# Altium PCB PCB1.PcbDoc
Units mil, origin at the board's own origin, x right, y up, seen from the top; angles counter-clockwise.
Board outline 2040 x 4130 mil, 2 copper layers (Top Layer, Bottom Layer); 17 components, 16 nets, 106 pads, 0 vias.
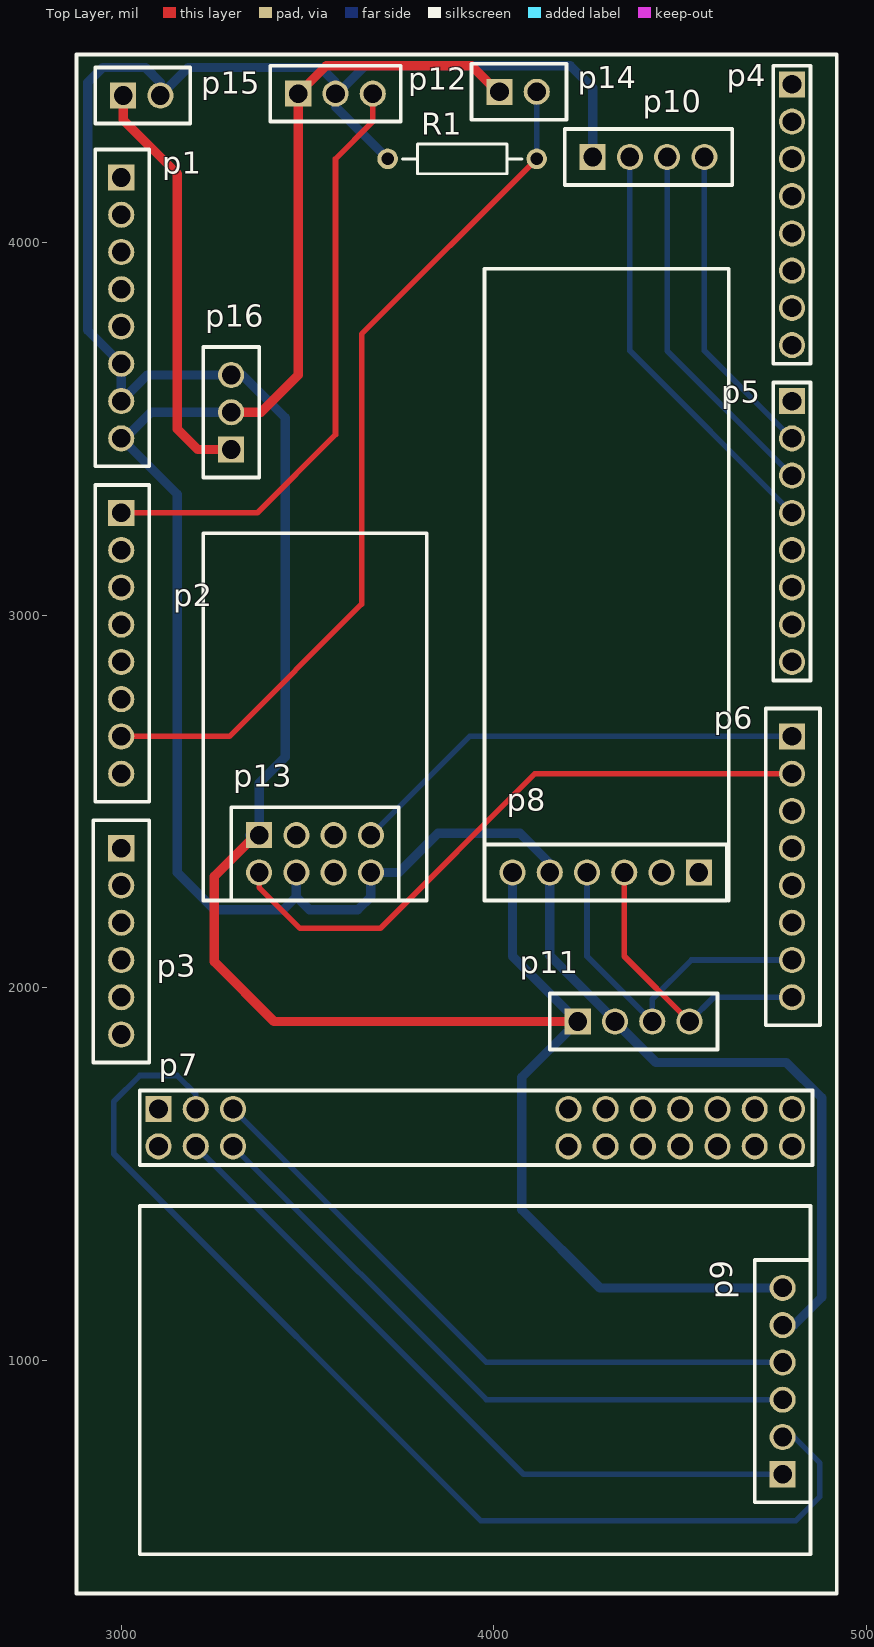
[diagram p0: Top Layer view]
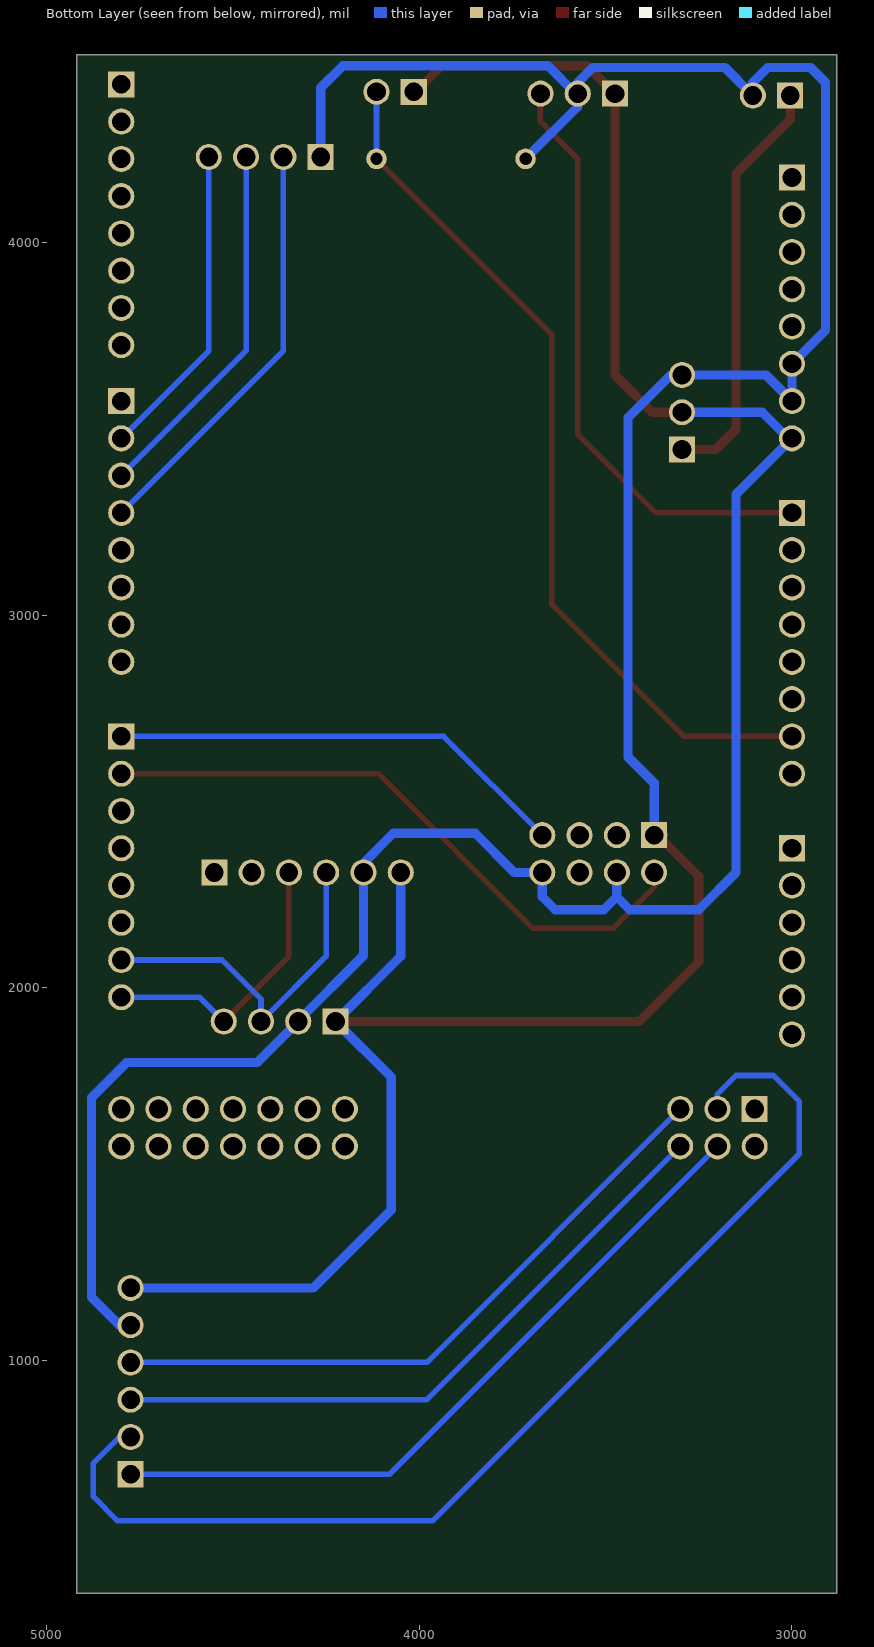
[diagram p1: Bottom Layer view, seen from below]

## Layer stack, top to bottom
Top Solder: solder mask 0.4, Solder Resist, Dk 3.5
Top Layer: signal copper 1.4
Dielectric 1: dielectric 12.6, FR-4, Dk 4.8
Bottom Layer: signal copper 1.4
Bottom Solder: solder mask 0.4, Solder Resist, Dk 3.5

## Board outline
2880,375 4920,375 4920,4505 2880,4505

## Design rules (kind name [scope] priority, off if disabled: settings)
Clearance [All] p1: gap=10 ignorepadtopadclearanceinfootprint=FALSE except(0: Arc-Hole Track-Hole SMDPad-Hole THPad-Hole Via-Hole Fill-Hole Poly-Hole Region-Hole Text-Hole)
PolygonConnect [All] p1: connectstyle=Relief reliefconductorwidth=10 reliefentries=4 polygonreliefangle="90 Angle" airgapwidth=10
RoutingVias [All] p1: holewidth=28 width=50 viastyle="Through Hole" minholewidth=28 minwidth=50 maxholewidth=28 maxwidth=50
SolderMaskExpansion [All] p1: expansion=4
Width Width_3 [InNet('V6V')] p1: maxlimit=30 minlimit=20 preferedwidth=25
Width Width_2 [InNet('VCC')] p2: maxlimit=30 minlimit=20 preferedwidth=25
Width Width_1 [InNet('GND')] p3: maxlimit=30 minlimit=20 preferedwidth=25
Width [All] p4: maxlimit=20 minlimit=10 preferedwidth=15
30 further rules are at their usual default settings.

## Components (designator, comment, footprint, x,y, rotation, side; value= is the part's Value field where it differs from the comment)
p1 "pin_8" pin_8 3000,4175 r270 top
p2 "pin_8" pin_8 3000,3275 r270 top
p3 "PIN_6" pin_6 3000,2375 r270 top
p4 "pin_8" pin_8 4800,4425 r270 top
p5 "pin_8" pin_8 4800,3575 r270 top
p6 "pin_8" pin_8 4800,2675 r270 top
p7 "pin_18_2" pin_18_2 3100,1675 r0 top
p8 "Time_Module" pin_6 4550,2310 r180 top
p9 "SD_Card" pin_6 4775,695 r90 top
p10 "RGB" pin_4 4265,4230 r0 top
p11 "LCD" pin_4 4225,1910 r0 top
p12 "EMG" PIN_3 3475,4400 r0 top
p13 "ESP" pin_4_2 3370,2410 r0 top
p14 "pin_2" PIN_2 4015,4405 r0 top
p15 "power" PIN_2 3005,4395 r0 top
p16 "LD1117AL" PIN_3 3295,3445 r90 top
R1 "Res2" AXIAL-0.4 3915,4225 r0 top value=10K

## Footprints (in the part's own frame and the unit in brackets; to place one, negate y for a bottom-side part, rotate by r counter-clockwise, add the part's x,y. Pads: shape width x height; smd on the part's side, far side on the other; paste and mask are expansions set on the pad)
AXIAL-0.4 [mm] "Axial Device, Thru-Hole; 2 Leads; 0.4 in Pin Spacing"
  round 1.4 hole 0.85: 1(-5.08,0) 2(5.08,0)
  silkscreen extent -4.06,-1.02 4.06,1.02
PIN_2 [mil]
  rect 70x70 hole 50: 0(0,0)
  round 70 hole 50: 1(100,0)
  silkscreen extent -75,-75 180,75
PIN_3 [mil]
  rect 70x70 hole 50: 0(0,0)
  round 70 hole 50: 1(100,0) 2(200,0)
  silkscreen extent -75,-75 275,75
pin_4 [mil]
  rect 70x70 hole 50: 0(0,0)
  round 70 hole 50: 1(100,0) 2(200,0) 3(300,0)
  silkscreen extent -75,-75 375,75
pin_4_2 [mil]
  rect 70x70 hole 50: 0(0,0)
  round 70 hole 50: 1(100,0) 2(200,0) 3(300,0) 4(0,-100) 5(100,-100) 6(200,-100) 7(300,-100)
  silkscreen extent -75,-175 375,75
pin_6 [mil]
  rect 70x70 hole 50: 0(0,0)
  round 70 hole 50: 1(100,0) 2(200,0) 3(300,0) 4(400,0) 5(500,0)
  silkscreen extent -75,-75 575,75
pin_8 [mil]
  rect 70x70 hole 50: 0(0,0)
  round 70 hole 50: 1(100,0) 2(200,0) 3(300,0) 4(400,0) 5(500,0) 6(600,0) 7(700,0)
  silkscreen extent -75,-70 775,75
pin_18_2 [mil]
  rect 70x70 hole 50: 0(0,0)
  round 70 hole 50: 1(100,0) 2(200,0) 11(1100,0) 12(1200,0) 13(1300,0) 14(1400,0) 15(1500,0) 16(1600,0) 17(1700,0) 18(0,-100) 19(100,-100) 20(200,-100) 29(1100,-100) 30(1200,-100) 31(1300,-100) 32(1400,-100) 33(1500,-100) 34(1600,-100) 35(1700,-100)
  silkscreen extent -50,-150 1755,50

## Part data
p3 p8 p9: library part pin_6
p10 p11: library part pin_4
p12 p16: library part pin_3
p13: library part pin_4_2
p15: library part pin_2
R1: "Resistor", LatestRevisionDate=17-Jul-2002, LatestRevisionNote="Re-released for DXP Platform.", PackageDescription="Axial Device, Thru-Hole; 2 Leads; 0.4 in Pin Spacing", PackageReference=AXIAL-0.4, Published=8-Jun-2000, Publisher="Altium Limited"

## Nets (pads, with @x,y where several pads share a name; then routed paths per layer and width w, separated by ;. In a path a pad name is that pad's centre, name@x,y a point inside that pad or via, vN(x,y) a via of type N, cw(c..) or ccw(c..) an arc to the next point about the centre after c; other vN are vias at no path point)
A0: p2.0 p12.2 | length 1618.4
  Top Layer w15: p2.0 3365,3275 3575,3485 3575,4225 3675,4325 p12.2
A6: p2.6 p14.1 R1.2 | length 2361.7
  Top Layer w15: p2.6 3290,2675 3645,3030 3645,3755 R1.2
  Bottom Layer w15: R1.2 p14.1
GND: p1.5 p1.6 p8.5 p9.5 p10.0 p11.0 p12.1 p13.0 p15.1 p16.2 R1.1 | length 7821
  Top Layer w25: p13.0 3360,2410 3250,2300 3250,2070 3410,1910 p11.0
  Bottom Layer w25: p13.0@3345,2410 p13.0 3370,2550 3440,2620 3440,3530 3325,3645 p16.2 3070,3645 p1.6 p1.5 2910,3765 2910,4430 2950,4470 3065,4470 3105,4430 p15.1 3180,4470 3535,4470 3575,4430 p12.1 ; R1.1 3575,4365 p12.1 ; p8.5 4050,2085 p11.0 4075,1760 4075,1405 4285,1195 p9.5 ; p10.0 4265,4415 4205,4475 3655,4475 3580,4400 p12.1
N4: p5.3 p10.1 | length 1135.2
  Bottom Layer w15: p10.1 4365,3710 p5.3
N5: p5.2 p10.2 | length 993.8
  Bottom Layer w15: p10.2 4465,3710 p5.2
N6: p5.1 p10.3 | length 852.3
  Bottom Layer w15: p10.3 4565,3710 p5.1
n50: p7.2 p9.3 | length 1756.7
  Bottom Layer w15: p7.2 3980,995 p9.3
n51: p7.20 p9.2 | length 1756.7
  Bottom Layer w15: p7.20 3980,895 p9.2
n52: p7.1 p9.1 | length 2998.6
  Bottom Layer w15: p7.1 3200,1715 3150,1765 3050,1765 2980,1695 2980,1555 3965,570 4810,570 4875,635 4875,725 4805,795 p9.1
n53: p7.19 p9.0 | length 1939.5
  Bottom Layer w15: p7.19 4080,695 p9.0
RX3: p6.1 p13.4 | length 1687.5
  Top Layer w15: p13.4 3370,2270 3480,2160 3695,2160 4110,2575 p6.1
SCL: p6.7 p8.2 p11.3 | length 774.4
  Top Layer w15: p8.2 4350,2085 p11.3
  Bottom Layer w15: p11.3 4590,1975 p6.7
SDA: p6.6 p8.3 p11.2 | length 951
  Bottom Layer w15: p8.3 4250,2085 p11.2 4425,1970 4530,2075 p6.6
TX3: p6.0 p13.3 | length 1239.8
  Bottom Layer w15: p13.3 3935,2675 p6.0
V6V: p15.0 p16.0 | length 1122.8
  Top Layer w25: p15.0 3005,4330 3150,4185 3150,3500 3205,3445 p16.0
VCC: p1.7 p8.4 p9.4 p11.1 p12.0 p13.5 p13.7 p14.0 p16.1 | length 6227.6
  Top Layer w25: p16.1 3375,3545 3475,3645 p12.0 3550,4475 3940,4475 4010,4405 p14.0
  Bottom Layer w25: p16.1 3080,3545 3010,3475 p1.7 3150,3325 3150,2310 3250,2210 3435,2210 3470,2245 ; p13.5 3470,2245 ; p9.4 4805,1095 4880,1170 4880,1705 4785,1800 4435,1800 p11.1 4325,1911.82 4150,2086.82 p8.4 4150,2335 4070,2415 3850,2415 3745,2310 p13.7 3670,2245 3635,2210 3505,2210 3470,2245
pads on no net: p1.0 p1.1 p1.2 p1.3 p1.4 p2.1 p2.2 p2.3 p2.4 p2.5 p2.7 p3.0 p3.1 p3.2 p3.3 p3.4 p3.5 p4.0 p4.1 p4.2 p4.3 p4.4 p4.5 p4.6 p4.7 p5.0 p5.4 p5.5 p5.6 p5.7 p6.2 p6.3 p6.4 p6.5 p7.0 p7.11 p7.12 p7.13 p7.14 p7.15 p7.16 p7.17 p7.18 p7.29 p7.30 p7.31 p7.32 p7.33 p7.34 p7.35 p8.0 p8.1 p13.1 p13.2 p13.6

## Silkscreen, mask and mechanical layers (free items; w line width, h text height)
Top Overlay:
  lines w10: 3975,2235 3975,3930 4630,3930 4630,2235 ; 2880,375 2880,1415 2880,4505 4920,4505 4920,375 2880,375 ; 3050,480 4850,480 4850,945 4850,1415 3050,1415 3050,480 ; 3220,2235 3520,2235 3820,2235 3820,3220 3220,3220 3220,2235